# Altium PCB test.PcbDoc
Units mil, origin at the board's own origin, x right, y up, seen from the top; angles counter-clockwise.
Board outline 6000 x 4000 mil, 3 copper layers (Top Layer, Mid-Layer 4, Bottom Layer); 165 components, 138 nets, 748 pads, 4 vias.
Unrouted connection lines stored in the file: 565.
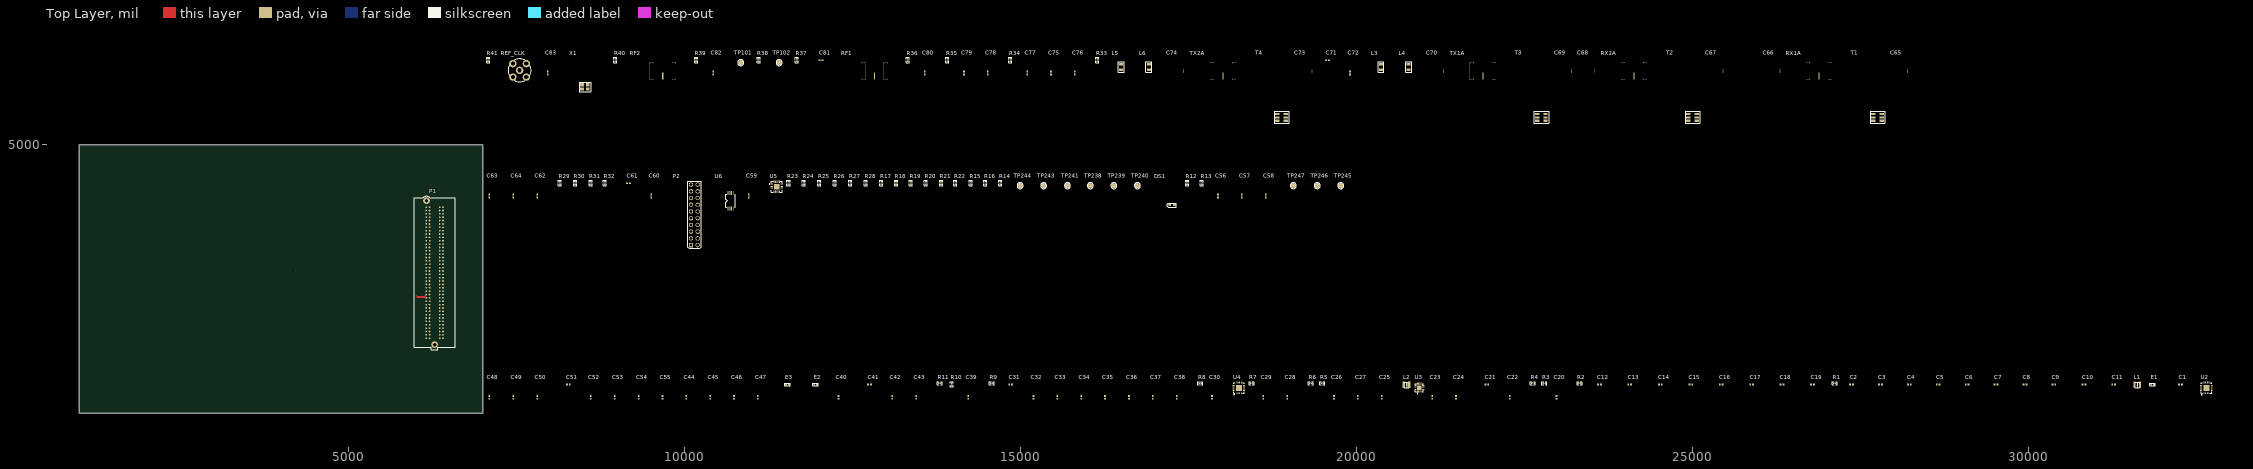
[diagram p0: Top Layer view]
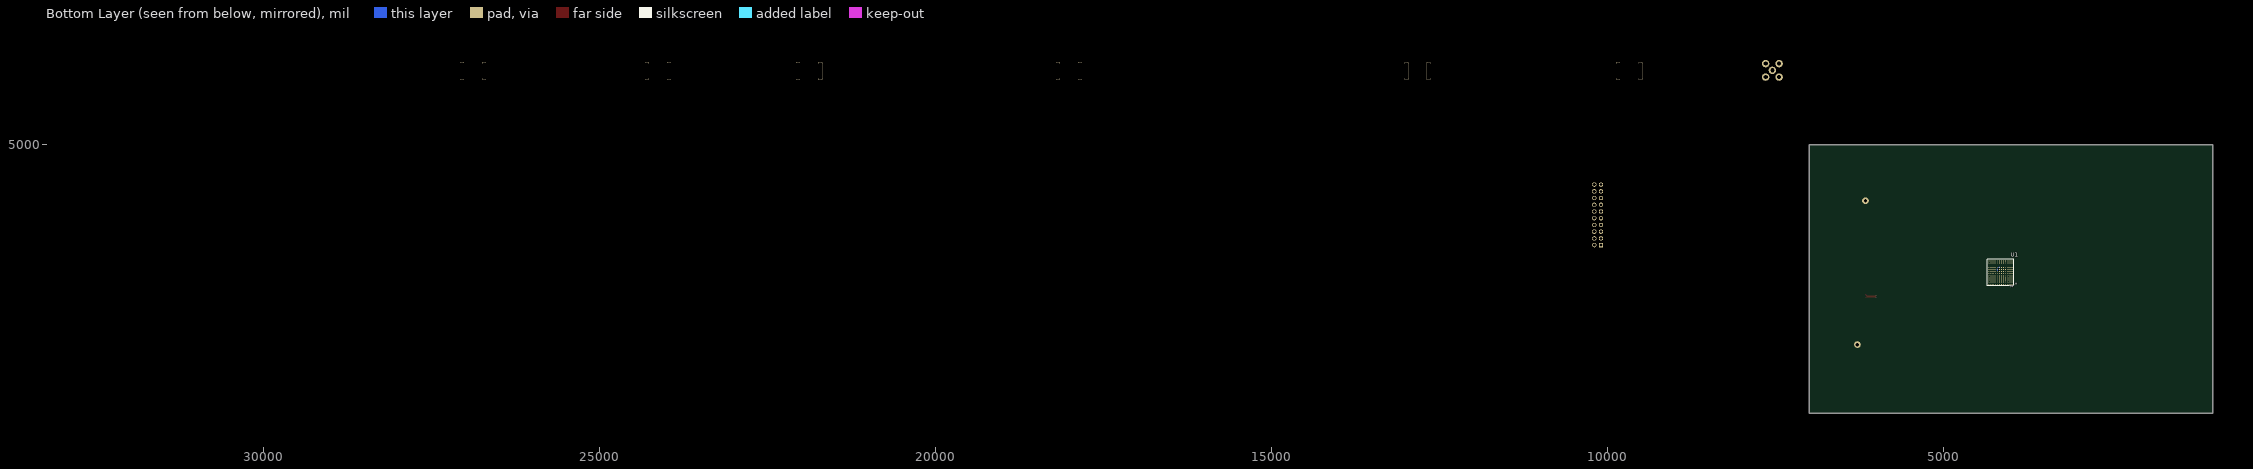
[diagram p1: Bottom Layer view, seen from below]
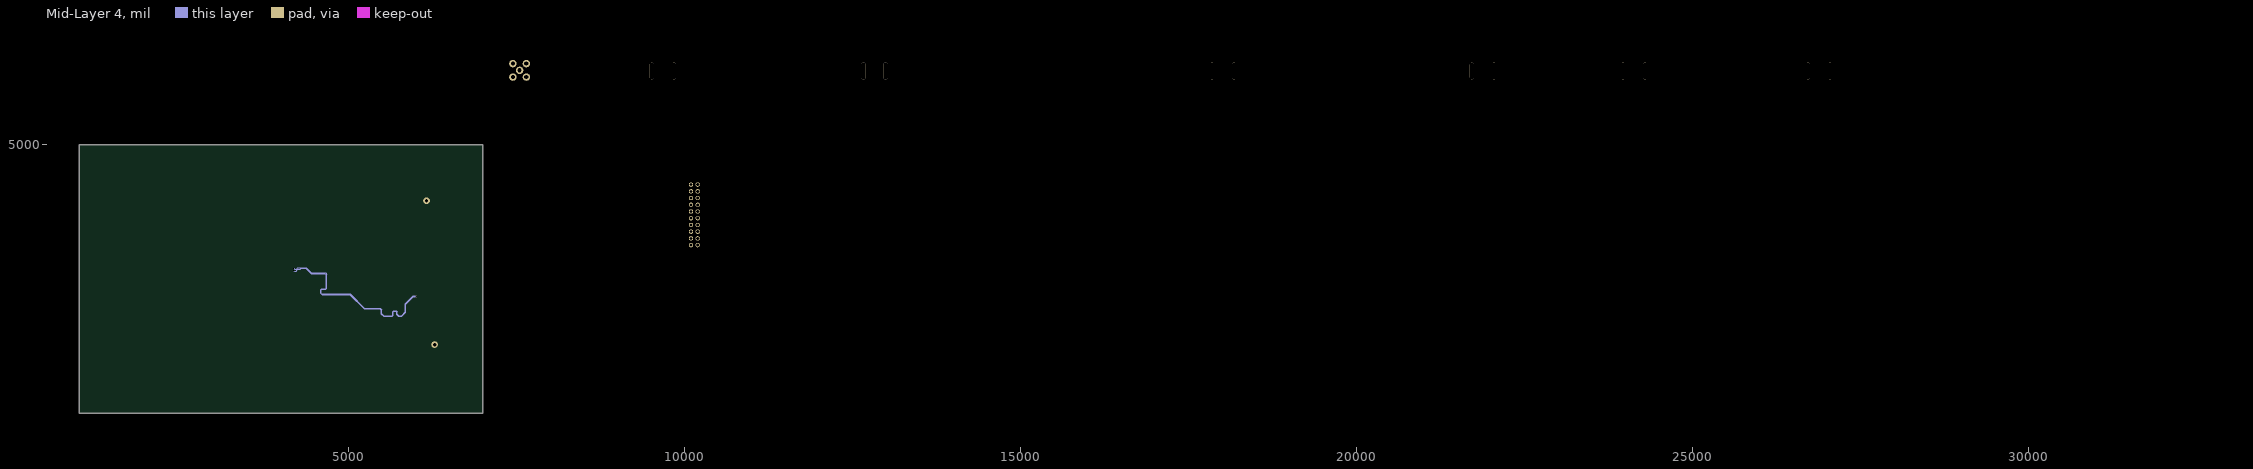
[diagram p2: Mid-Layer 4]

## Layer stack, top to bottom
Top Solder: solder mask 0.4, Solder Resist, Dk 3.5
Top Layer: signal copper 1.4
Dielectric 1: dielectric 12.6, FR-4, Dk 4.8
Mid-Layer 4: signal copper 1.4
Dielectric2: dielectric 12.6, FR-4, Dk 4.8
Bottom Layer: signal copper 1.4
Bottom Solder: solder mask 0.4, Solder Resist, Dk 3.5

## Board outline
1000,1000 7000,1000 7000,5000 1000,5000

## Design rules (kind name [scope] priority, off if disabled: settings)
Clearance [All] p1: gap=10 ignorepadtopadclearanceinfootprint=FALSE except(0: Arc-Hole Track-Hole SMDPad-Hole THPad-Hole Via-Hole Fill-Hole Poly-Hole Region-Hole Text-Hole)
DiffPairsRouting [All] p1: maxlimit=10 minlimit=10 mostfreqgap=10 toplayer_minwidth=15 toplayer_maxwidth=15 toplayer_prefwidth=15 midlayer4_minwidth=15 midlayer4_maxwidth=15 midlayer4_prefwidth=15 bottomlayer_minwidth=15 bottomlayer_maxwidth=15 bottomlayer_prefwidth=15 maxuncoupledlength=500
PolygonConnect [All] p1: connectstyle=Relief reliefconductorwidth=10 reliefentries=4 polygonreliefangle="90 Angle" airgapwidth=10
RoutingVias [All] p1: holewidth=28 width=50 viastyle="Through Hole" minholewidth=28 minwidth=50 maxholewidth=28 maxwidth=50
SolderMaskExpansion [All] p1: expansion=4 istentingtop=FALSE
Width [All] p1: maxlimit=10 minlimit=10 preferedwidth=10
29 further rules are at their usual default settings.

## Classes and differential pairs
component class "03 AD9361_Digital": C65 C66 C67 C68 C69 C70 C71 C72 C73 C74 C75 C76 C77 C78 C79 C80 C81 C82 C83 L3 L4 L5 L6 R33 R34 R35 R36 R37 R38 R39 R40 R41 REF_CLK RF1 RF2 RX1A RX2A T1 T2 T3 T4 TP101 TP102 TX1A TX2A U1 X1
component class "02 LP_FMC": C56 C57 C58 C59 C60 C61 C62 C63 C64 DS1 P1 P2 R12 R13 R14 R15 R16 R17 R18 R19 R20 R21 R22 R23 R24 R25 R26 R27 R28 R29 R30 R31 R32 TP238 TP239 TP240 TP241 TP243 TP244 TP245 TP246 TP247 U5 U6
component class "01 POWER": C1 C2 C3 C4 C5 C6 C7 C8 C9 C10 C11 C12 C13 C14 C15 C16 C17 C18 C19 C20 C21 C22 C23 C24 C25 C26 C27 C28 C29 C30 C31 C32 C33 C34 C35 C36 C37 C38 C39 C40 C41 C42 C43 C44 C45 C46 C47 C48 C49 C50 C51 C52 C53 C54 C55 E1 E2 E3 L1 L2 R1 R2 R3 R4 R5 R6 R7 R8 R9 R10 R11 U2 U3 U4
differential pair TX_FRAME: +TX_FRAME_P -TX_FRAME_N
differential pair TX_D5: +TX_D5_P -TX_D5_N
differential pair TX_D4: +TX_D4_P -TX_D4_N
differential pair TX_D3: +TX_D3_P -TX_D3_N
differential pair TX_D2: +TX_D2_P -TX_D2_N
differential pair TX_D1: +TX_D1_P -TX_D1_N
differential pair TX_D0: +TX_D0_P -TX_D0_N
differential pair TX2A: +TX2A_P -TX2A_N
differential pair TX1A: +TX1A_P -TX1A_N
differential pair RX_FRAME: +RX_FRAME_P -RX_FRAME_N
differential pair RX_D5: +RX_D5_P -RX_D5_N
differential pair RX_D4: +RX_D4_P -RX_D4_N
differential pair RX_D3: +RX_D3_P -RX_D3_N
differential pair RX_D2: +RX_D2_P -RX_D2_N
differential pair RX_D1: +RX_D1_P -RX_D1_N
differential pair RX_D0: +RX_D0_P -RX_D0_N
differential pair RX2A: +RX2A_P -RX2A_N
differential pair RX1A: +RX1A_P -RX1A_N
differential pair FB_CLK: +FB_CLK_P -FB_CLK_N
differential pair DATA_CLK: +DATA_CLK_P -DATA_CLK_N

## Components (designator, comment, footprint, x,y, rotation, side; value= is the part's Value field where it differs from the comment)
C1 "0.1UF" C0402 32260,1430 r0 top
C2 "10UF" C0402 27365,1430 r0 top
C3 "0.1UF" C0402 27795,1430 r0 top
C4 "10UF" C0402 28225,1430 r0 top
C5 "0.1UF" C0402 28655,1430 r0 top
C6 "0.1UF" C0402 29085,1430 r0 top
C7 "0.1UF" C0402 29515,1430 r0 top
C8 "1UF" C0402 29945,1430 r0 top
C9 "1UF" C0402 30375,1430 r0 top
C10 "0.01UF" C0402 30825,1430 r0 top
C11 "0.01UF" C0402 31265,1430 r0 top
C12 "10UF" C0402 23615,1430 r0 top
C13 "10UF" C0402 24065,1430 r0 top
C14 "0.1UF" C0402 24520,1430 r0 top
C15 "0.1UF" C0402 24975,1430 r0 top
C16 "0.1UF" C0402 25425,1430 r0 top
C17 "0.1UF" C0402 25880,1430 r0 top
C18 "0.01UF" C0402 26330,1430 r0 top
C19 "1UF" C0402 26785,1430 r0 top
C20 "0.01UF" C0402 22975,1240 r90 top
C21 "0.01UF" C0402 21940,1430 r0 top
C22 "1UF" C0402 22280,1240 r90 top
C23 "0.01UF" C0402 21125,1240 r90 top
C24 "1UF" C0402 21480,1240 r90 top
C25 "10μF" C0402 20375,1240 r90 top
C26 "0.01UF" C0402 19665,1240 r90 top
C27 "1UF" C0402 20020,1240 r90 top
C28 "10μF" C0402 18970,1240 r90 top
C29 "0.1μF" C0402 18615,1240 r90 top
C30 "0.1UF" C0402 17850,1240 r90 top
C31 "10UF" C0402 14855,1430 r0 top
C32 "10UF" C0402 15195,1240 r90 top
C33 "0.1UF" C0402 15550,1240 r90 top
C34 "0.1UF" C0402 15905,1240 r90 top
C35 "0.1UF" C0402 16260,1240 r90 top
C36 "0.1UF" C0402 16615,1240 r90 top
C37 "0.01UF" C0402 16970,1240 r90 top
C38 "1UF" C0402 17325,1240 r90 top
C39 "0.01UF" C0402 14225,1240 r90 top
C40 "0.01UF" C0402 12295,1240 r90 top
C41 "1UF" C0402 12755,1430 r0 top
C42 "0.01UF" C0402 13095,1240 r90 top
C43 "1UF" C0402 13450,1240 r90 top
C44 "0.01UF" C0402 10030,1240 r90 top
C45 "1UF" C0402 10385,1240 r90 top
C46 "0.01UF" C0402 10740,1240 r90 top
C47 "1UF" C0402 11095,1240 r90 top
C48 "10UF" C0402 7100,1240 r90 top
C49 "0.1UF" C0402 7455,1240 r90 top
C50 "10UF" C0402 7810,1240 r90 top
C51 "0.1UF" C0402 8275,1430 r0 top
C52 "1UF" C0402 8610,1240 r90 top
C53 "0.01UF" C0402 8965,1240 r90 top
C54 "1UF" C0402 9320,1240 r90 top
C55 "0.01UF" C0402 9675,1240 r90 top
C56 "0.1UF" C0402 17940,4235 r90 top
C57 "0.1UF" C0402 18295,4235 r90 top
C58 "0.1UF" C0402 18650,4235 r90 top
C59 "0.1UF" C0402 10960,4235 r90 top
C60 "0.1UF" C0402 9510,4235 r90 top
C61 "10UF" C0402 9170,4425 r0 top
C62 "1UF" C0402 7810,4235 r90 top
C63 "0.1UF" C0402 7100,4235 r90 top
C64 "10UF" C0402 7455,4235 r90 top
C65 "18PF" C0201 28200,6095 r90 top
C66 "18PF" C0201 26300,6095 r90 top
C67 "18PF" C0201 25450,6095 r90 top
C68 "18PF" C0201 23545,6095 r90 top
C69 "18PF" C0201 23200,6095 r90 top
C70 "18PF" C0201 21295,6095 r90 top
C71 "10UF" C0402 19570,6255 r0 top
C72 "1000PF" C0402 19905,6065 r90 top
C73 "18PF" C0201 19335,6095 r90 top
C74 "18PF" C0201 17430,6095 r90 top
C75 "10UF" C0402 15455,6065 r90 top
C76 "1000PF" C0402 15810,6065 r90 top
C77 "1UF" C0402 15100,6065 r90 top
C78 "1000PF" C0402 14515,6065 r90 top
C79 "1UF" C0402 14160,6065 r90 top
C80 "1000PF" C0402 13575,6065 r90 top
C81 "1000PF" C0402 12035,6255 r0 top
C82 "1000PF" C0402 10430,6065 r90 top
C83 "0.1UF" C0402 7970,6065 r90 top
DS1 "16-213SURC/S530-A3/TR8" LED0603 17255,4100 r0 top
E1 "750OHM" L0402 31845,1430 r0 top
E2 "750OHM" L0402 11955,1430 r0 top
E3 "750OHM" L0402 11535,1430 r0 top
L1 "0.47UH" L1008 31615,1425 r0 top
L2 "2.2UH" L1008 20745,1425 r0 top
L3 "330NH" L0805-F 20365,6155 r90 top
L4 "330NH" L0805-F 20775,6155 r90 top
L5 "330NH" L0805-F 16500,6155 r90 top
L6 "330NH" L0805-F 16910,6155 r90 top
P1 "ASP-134604-01" CNSAMTECASP-134604-01 6285,3088.5 r90 top
P2 "Header 10X2" CNBERGF2X10H335LD32 10150,3955 r90 top
R1 "0" LC-0402_R 27115,1450 r0 top
R2 "16K" LC-0402_R 23320,1450 r0 top
R3 "10K" LC-0402_R 22795,1450 r0 top
R4 "10K" LC-0402_R 22625,1450 r0 top
R5 "10K" LC-0402_R 19490,1450 r0 top
R6 "18.7K" LC-0402_R 19320,1450 r0 top
R7 "15K" LC-0402_R 18440,1450 r0 top
R8 "0" LC-0402_R 17675,1450 r0 top
R9 "16K" LC-0402_R 14575,1450 r0 top
R10 "10K" LC-0402_R 13980,1435 r90 top
R11 "10K" LC-0402_R 13800,1450 r0 top
R12 "10K" LC-0402_R 17480,4430 r90 top
R13 "237" LC-0402_R 17700,4430 r90 top
R14 "49.9" LC-0402_R 14700,4430 r90 top
R15 "2K" LC-0402_R 14260,4430 r90 top
R16 "2K" LC-0402_R 14480,4430 r90 top
R17 "10K" LC-0402_R 12930,4430 r90 top
R18 "10K" LC-0402_R 13150,4430 r90 top
R19 "10K" LC-0402_R 13370,4430 r90 top
R20 "10K" LC-0402_R 13590,4430 r90 top
R21 "10K" LC-0402_R 13820,4430 r90 top
R22 "10K" LC-0402_R 14030,4430 r90 top
R23 "16K" LC-0402_R 11550,4430 r90 top
R24 "16K" LC-0402_R 11780,4430 r90 top
R25 "16K" LC-0402_R 12010,4430 r90 top
R26 "16K" LC-0402_R 12240,4430 r90 top
R27 "16K" LC-0402_R 12470,4430 r90 top
R28 "16K" LC-0402_R 12700,4430 r90 top
R29 "10K" LC-0402_R 8145,4430 r90 top
R30 "10K" LC-0402_R 8375,4430 r90 top
R31 "10K" LC-0402_R 8605,4430 r90 top
R32 "10K" LC-0402_R 8815,4430 r90 top
R33 "14.3K" LC-0402_R 16145,6260 r90 top
R34 "1" LC-0402_R 14850,6260 r90 top
R35 "1" LC-0402_R 13910,6260 r90 top
R36 "10" LC-0402_R 13325,6260 r90 top
R37 "49.9" LC-0402_R 11675,6260 r90 top
R38 "10K" LC-0402_R 11105,6260 r90 top
R39 "10" LC-0402_R 10175,6260 r90 top
R40 "49.9" LC-0402_R 8975,6260 r90 top
R41 "49.9" LC-0402_R 7080,6260 r90 top
REF_CLK "DOSIN-806-0010" CNJOHNSON142-0701-201 7550,6105 r90 top
RF1 "DOSIN-806-0010" CNJOHNSON142-0701-851 12830,6105 r90 top
RF2 "DOSIN-806-0010" CNJOHNSON142-0701-851 9680,6105 r90 top
RX1A "DOSIN-806-0010" CNJOHNSON142-0701-851 26880,6105 r90 top
RX2A "DOSIN-806-0010" CNJOHNSON142-0701-851 24130,6105 r90 top
T1 "TCM1-63AX+" TSML150W160H160 27750,5405 r90 top
T2 "TCM1-63AX+" TSML150W160H160 25000,5405 r90 top
T3 "TCM1-63AX+" TSML150W160H160 22750,5405 r90 top
T4 "TCM1-63AX+" TSML150W160H160 18885,5405 r90 top
TP101 "TEST POINT SURFACE" TPC75D45 10840,6220 r90 top
TP102 "TEST POINT SURFACE" TPC75D45 11410,6220 r90 top
TP238 "TEST POINT SURFACE" TPC75D45 16040,4390 r90 top
TP239 "TEST POINT SURFACE" TPC75D45 16390,4390 r90 top
TP240 "TEST POINT SURFACE" TPC75D45 16740,4390 r90 top
TP241 "TEST POINT SURFACE" TPC75D45 15700,4390 r90 top
TP243 "TEST POINT SURFACE" TPC75D45 15345,4390 r90 top
TP244 "TEST POINT SURFACE" TPC75D45 14995,4390 r90 top
TP245 "TEST POINT SURFACE" TPC75D45 19765,4390 r90 top
TP246 "TEST POINT SURFACE" TPC75D45 19415,4390 r90 top
TP247 "TEST POINT SURFACE" TPC75D45 19060,4390 r90 top
TX1A "DOSIN-806-0010" CNJOHNSON142-0701-851 21880,6105 r90 top
TX2A "DOSIN-806-0010" CNJOHNSON142-0701-851 18015,6105 r90 top
U1 "AD9363" AD936X 4121.03,3086.54 r0 bottom
U2 "ADP1755ACPZ-R7" LFCSP-WQ-16_L4.0-W4.0-P0.65-EP2.3-BL-EP 32645,1380 r0 top
U3 "TLV62130" TLV62130RGT 20935,1385 r0 top
U4 "ADP1755ACPZ-R7" LFCSP-WQ-16_L4.0-W4.0-P0.65-EP2.3-BL-EP 18250,1380 r0 top
U5 "AD7291BCPZ-RL7" LFCSP-20_L4.0-W4.0-P0.50-TL-EP2.7 11375,4375 r0 top
U6 "M24C02-WDW6TP" TSSOP8 10690,4165 r0 top
X1 "40MHz" XTALNX3225 8520,5860 r0 top

## Footprints (in the part's own frame and the unit in brackets; to place one, negate y for a bottom-side part, rotate by r counter-clockwise, add the part's x,y. Pads: shape width x height; smd on the part's side, far side on the other; paste and mask are expansions set on the pad)
AD936X [mil]
  round 14 smd: A1(-137.01,164.51) A2(-105.51,164.51) A3(-74.02,164.51) A4(-42.52,164.51) A5(-11.02,164.51) A6(20.47,164.51) A7(51.97,164.51) A8(83.46,164.51) A9(114.96,164.51) A10(146.46,164.51) A11(177.95,164.51) A12(209.45,164.51) B1(-137.01,133.01) B2(-105.51,133.01) B3(-74.02,133.01) B4(-42.52,133.01) B5(-11.02,133.01) B6(20.47,133.01) B7(51.97,133.01) B8(83.46,133.01) B9(114.96,133.01) B10(146.46,133.01) B11(177.95,133.01) B12(209.45,133.01) C1(-137.01,101.52) C2(-105.51,101.52) C3(-74.02,101.52) C4(-42.52,101.52) C5(-11.02,101.52) C6(20.47,101.52) C7(51.97,101.52) C8(83.46,101.52) C9(114.96,101.52) C10(146.46,101.52) C11(177.95,101.52) C12(209.45,101.52) D1(-137.01,70.02) D2(-105.51,70.02) D3(-74.02,70.02) D4(-42.52,70.02) D5(-11.02,70.02) D6(20.47,70.02) D7(51.97,70.02) D8(83.46,70.02) D9(114.96,70.02) D10(146.46,70.02) D11(177.95,70.02) D12(209.45,70.02) E1(-137.01,38.52) E2(-105.51,38.52) E3(-74.02,38.52) E4(-42.52,38.52) E5(-11.02,38.52) E6(20.47,38.52) E7(51.97,38.52) E8(83.46,38.52) E9(114.96,38.52) E10(146.46,38.52) E11(177.95,38.52) E12(209.45,38.52) F1(-137.01,7.03) F2(-105.51,7.03) F3(-74.02,7.03) F4(-42.52,7.03) F5(-11.02,7.03) F6(20.47,7.03) F7(51.97,7.03) F8(83.46,7.03) F9(114.96,7.03) F10(146.46,7.03) F11(177.95,7.03) F12(209.45,7.03) G1(-137.01,-24.47) G2(-105.51,-24.47) G3(-74.02,-24.47) G4(-42.52,-24.47) G5(-11.02,-24.47) G6(20.47,-24.47) G7(51.97,-24.47) G8(83.46,-24.47) G9(114.96,-24.47) G10(146.46,-24.47) G11(177.95,-24.47) G12(209.45,-24.47) H1(-137.01,-55.96) H2(-105.51,-55.96) H3(-74.02,-55.96) H4(-42.52,-55.96) H5(-11.02,-55.96) H6(20.47,-55.96) H7(51.97,-55.96) H8(83.46,-55.96) H9(114.96,-55.96) H10(146.46,-55.96) H11(177.95,-55.96) H12(209.45,-55.96) J1(-137.01,-87.46) J2(-105.51,-87.46) J3(-74.02,-87.46) J4(-42.52,-87.46) J5(-11.02,-87.46) J6(20.47,-87.46) J7(51.97,-87.46) J8(83.46,-87.46) J9(114.96,-87.46) J10(146.46,-87.46) J11(177.95,-87.46) J12(209.45,-87.46) K1(-137.01,-118.96) K2(-105.51,-118.96) K3(-74.02,-118.96) K4(-42.52,-118.96) K5(-11.02,-118.96) K6(20.47,-118.96) K7(51.97,-118.96) K8(83.46,-118.96) K9(114.96,-118.96) K10(146.46,-118.96) K11(177.95,-118.96) K12(209.45,-118.96) L1(-137.01,-150.45) L2(-105.51,-150.45) L3(-74.02,-150.45) L4(-42.52,-150.45) L5(-11.02,-150.45) L6(20.47,-150.45) L7(51.97,-150.45) L8(83.46,-150.45) L9(114.96,-150.45) L10(146.46,-150.45) L11(177.95,-150.45) L12(209.45,-150.45) M1(-137.01,-181.95) M2(-105.51,-181.95) M3(-74.02,-181.95) M4(-42.52,-181.95) M5(-11.02,-181.95) M6(20.47,-181.95) M7(51.97,-181.95) M8(83.46,-181.95) M9(114.96,-181.95) M10(146.46,-181.95) M11(177.95,-181.95) M12(209.45,-181.95)
  silkscreen extent -161,-206 233,188
C0201 [mil] "C0201"
  rect 14x14 smd: 1(-12,0) 2(12,0)
C0402 [mil] "C0402"
  rect 27.5x25 smd: 1(-21.25,0) 2(21.25,0)
CNBERGF2X10H335LD32 [mil] "CNBERGF2X10H335LD32"
  rect 65x65 / inner round 65 / far side rect 65x65 hole 45: 1(-450,50)
  round 65 hole 45: 2(-450,-50) 3(-350,50) 4(-350,-50) 5(-250,50) 6(-250,-50) 7(-150,50) 8(-150,-50) 9(-50,50) 10(-50,-50) 11(50,50) 12(50,-50) 13(150,50) 14(150,-50) 15(250,50) 16(250,-50) 17(350,50) 18(350,-50) 19(450,50) 20(450,-50)
  silkscreen extent -500,-100 500,100
CNJOHNSON142-0701-201 [mil] "CNJOHNSON142-0701-201"
  round 110 hole 63: 1(100,100) 2(100,-100) 3(-100,-100) 4(-100,100) 5(0,0)
  silkscreen extent -169,-172 169,172
CNJOHNSON142-0701-851 [mil] "CNJOHNSON142-0701-851"
  rect 100x17 smd: 1(-85,0)
  rect 250x60 / inner oval 250x60 / far side rect 250x60 hole 60 slot 250 at 0 deg: 2(-10,-165) 4(-10,165)
  round 12 smd: 3(-10,-165) 5(-10,165)
CNSAMTECASP-134604-01 [mil] "CNSAMTECASP-134604-01"
  round 25 smd: C1(-968.5,-125) C2(-918.5,-125) C3(-868.5,-125) C4(-818.5,-125) C5(-768.5,-125) C6(-718.5,-125) C7(-668.5,-125) C8(-618.5,-125) C9(-568.5,-125) C10(-518.5,-125) C11(-468.5,-125) C12(-418.5,-125) C13(-368.5,-125) C14(-318.5,-125) C15(-268.5,-125) C16(-218.5,-125) C17(-168.5,-125) C18(-118.5,-125) C19(-68.5,-125) C20(-18.5,-125) C21(31.5,-125) C22(81.5,-125) C23(131.5,-125) C24(181.5,-125) C25(231.5,-125) C26(281.5,-125) C27(331.5,-125) C28(381.5,-125) C29(431.5,-125) C30(481.5,-125) C31(531.5,-125) C32(581.5,-125) C33(631.5,-125) C34(681.5,-125) C35(731.5,-125) C36(781.5,-125) C37(831.5,-125) C38(881.5,-125) C39(931.5,-125) C40(981.5,-125) D1(-968.5,-75) D2(-918.5,-75) D3(-868.5,-75) D4(-818.5,-75) D5(-768.5,-75) D6(-718.5,-75) D7(-668.5,-75) D8(-618.5,-75) D9(-568.5,-75) D10(-518.5,-75) D11(-468.5,-75) D12(-418.5,-75) D13(-368.5,-75) D14(-318.5,-75) D15(-268.5,-75) D16(-218.5,-75) D17(-168.5,-75) D18(-118.5,-75) D19(-68.5,-75) D20(-18.5,-75) D21(31.5,-75) D22(81.5,-75) D23(131.5,-75) D24(181.5,-75) D25(231.5,-75) D26(281.5,-75) D27(331.5,-75) D28(381.5,-75) D29(431.5,-75) D30(481.5,-75) D31(531.5,-75) D32(581.5,-75) D33(631.5,-75) D34(681.5,-75) D35(731.5,-75) D36(781.5,-75) D37(831.5,-75) D38(881.5,-75) D39(931.5,-75) D40(981.5,-75) G1(-968.5,75) G2(-918.5,75) G3(-868.5,75) G4(-818.5,75) G5(-768.5,75) G6(-718.5,75) G7(-668.5,75) G8(-618.5,75) G9(-568.5,75) G10(-518.5,75) G11(-468.5,75) G12(-418.5,75) G13(-368.5,75) G14(-318.5,75) G15(-268.5,75) G16(-218.5,75) G17(-168.5,75) G18(-118.5,75) G19(-68.5,75) G20(-18.5,75) G21(31.5,75) G22(81.5,75) G23(131.5,75) G24(181.5,75) G25(231.5,75) G26(281.5,75) G27(331.5,75) G28(381.5,75) G29(431.5,75) G30(481.5,75) G31(531.5,75) G32(581.5,75) G33(631.5,75) G34(681.5,75) G35(731.5,75) G36(781.5,75) G37(831.5,75) G38(881.5,75) G39(931.5,75) G40(981.5,75) H1(-968.5,125) H2(-918.5,125) H3(-868.5,125) H4(-818.5,125) H5(-768.5,125) H6(-718.5,125) H7(-668.5,125) H8(-618.5,125) H9(-568.5,125) H10(-518.5,125) H11(-468.5,125) H12(-418.5,125) H13(-368.5,125) H14(-318.5,125) H15(-268.5,125) H16(-218.5,125) H17(-168.5,125) H18(-118.5,125) H19(-68.5,125) H20(-18.5,125) H21(31.5,125) H22(81.5,125) H23(131.5,125) H24(181.5,125) H25(231.5,125) H26(281.5,125) H27(331.5,125) H28(381.5,125) H29(431.5,125) H30(481.5,125) H31(531.5,125) H32(581.5,125) H33(631.5,125) H34(681.5,125) H35(731.5,125) H36(781.5,125) H37(831.5,125) H38(881.5,125) H39(931.5,125) H40(981.5,125)
  round 100 hole 50 unplated: ""(-1063.5,0) ""(1076.5,120)
  silkscreen extent -1142,-304 1141,304
L0402 [mil] "L0402"
  rect 27.5x25 smd: 1(-21.25,0) 2(21.25,0)
  silkscreen extent -41,-19 41,19
L0805-F [mil] "L0805-F"
  rect 43x59 smd: 1(41.19,0) 2(-41.19,0)
  silkscreen extent -78,-45 78,45
L1008 [mil]
  rect 33.5x98.4 smd: 1(-39.92,0) 2(40.08,0)
  silkscreen extent -31,-39 31,39
LC-0402_R [mm]
  rect 0.6x0.65 smd mask+0.051: 1(-0.425,0) 2(0.425,0)
  silkscreen extent -0.97,-0.58 0.97,0.58, body extent -0.57,-0.27 0.58,0.28, height 0.41
LED0603 [mil] "LED0603"
  rect 38x30 smd: A(31.5,0) C(-31.5,0)
  silkscreen extent -72,-31 66,31
LFCSP-20_L4.0-W4.0-P0.50-TL-EP2.7 [mm]
  rect 0.985x0.28 smd: 1(-1.868,1) 2(-1.868,0.5) 3(-1.868,0) 4(-1.868,-0.5) 5(-1.868,-1) 11(1.868,-1) 12(1.868,-0.5) 13(1.868,0) 14(1.868,0.5) 15(1.868,1)
  rect 0.28x0.985 smd: 6(-1,-1.868) 7(-0.5,-1.868) 8(0,-1.868) 9(0.5,-1.868) 10(1,-1.868) 16(1,1.868) 17(0.5,1.868) 18(0,1.868) 19(-0.5,1.868) 20(-1,1.868)
  rect 2.15x2.15 smd: 21(0,0)
  silkscreen extent -2.73,-2.08 2.08,2.08
LFCSP-WQ-16_L4.0-W4.0-P0.65-EP2.3-BL-EP [mm]
  rect 0.35x0.7 smd: 1(-0.975,-2) 2(-0.325,-2) 3(0.325,-2) 4(0.975,-2) 9(0.975,2) 10(0.325,2) 11(-0.325,2) 12(-0.975,2)
  rect 0.7x0.35 smd: 5(2,-0.975) 6(2,-0.325) 7(2,0.325) 8(2,0.975) 13(-2,0.975) 14(-2,0.325) 15(-2,-0.325) 16(-2,-0.975)
  rect 2.25x2.25 smd: 17(0,0)
  silkscreen extent -2,-2.56 2,2
TLV62130RGT [mil]
  oval 11x33.5 smd: 1(-29.5,-58.6) 2(-9.8,-58.6) 3(9.8,-58.6) 4(29.5,-58.6) 9(29.5,57.6) 10(9.8,57.6) 11(-9.8,57.6) 12(-29.5,57.6)
  oval 33.5x11 smd: 5(58.1,-30) 6(58.1,-10.3) 7(58.1,9.3) 8(58.1,29) 13(-58.1,29) 14(-58.1,9.3) 15(-58.1,-10.3) 16(-58.1,-30)
  rect 66.9x66.9 smd: 20(0,-0.5)
  silkscreen extent -59,-94 59,59
TPC75D45 [mil] "TPC75D45"
  round 75 smd: 1(0,0)
  silkscreen extent -45,-45 45,45
TSML150W160H160 [mil] "TSML150W160H160"
  rect 30x65.01 smd: 1(-50,62.5) 2(0,62.5) 3(50,62.5) 4(50,-62.5) 5(0,-62.5) 6(-50,-62.5)
  silkscreen extent -90,-110 90,110
TSSOP8 [mil] "TSSOP8"
  rect 13x65 smd: 1(-38.39,-114.96) 2(-12.8,-114.96) 3(12.8,-114.96) 4(38.39,-114.96) 5(38.39,114.96) 6(12.8,114.96) 7(-12.8,114.96) 8(-38.39,114.96)
  silkscreen extent -71,-99 71,99
XTALNX3225 [mil] "XTALNX3225"
  rect 55.01x47 smd: 1(-43.32,-31.51) 2(43.3,-31.51) 3(43.3,31.5) 4(-43.32,31.5)
  silkscreen extent -86,-70 86,70

## Part data
C1 C2 C3 C4 C5 C6 C7 C12 C13 C14 C15 C16 C17 C20 C30 C31 C32 C33 C34 C35 C36 C39 C48 C49 C50 C51 C56 C57 C58 C59 C60 C61 C63 C64 C65 C66 C67 C68 C69 C70 C71 C73 C74 C75 C83: BOM_Manufacturer=WTC, BOM_Manufacturer Part=0402B104K160, BOM_Supplier=LCSC, BOM_Supplier Part=C83056, nameAlias=Capacitance, spicePre=C, spiceSymbolName=0402B104K160
C8 C9 C10 C11 C18 C19 C21 C22 C23 C24 C26 C27 C37 C38 C40 C41 C42 C43 C44 C45 C46 C47 C52 C53 C54 C55: library part 10UF, BOM_Manufacturer=WTC, BOM_Manufacturer Part=0402B104K160, BOM_Supplier=LCSC, BOM_Supplier Part=C83056, nameAlias=Capacitance, spicePre=C, spiceSymbolName=0402B104K160
C25 C28 C29: library part CAP_3, "Capacitor"
C62 C77 C79: library part 0.1UF, BOM_Manufacturer=WTC, BOM_Manufacturer Part=0402B104K160, BOM_Supplier=LCSC, BOM_Supplier Part=C83056, nameAlias=Capacitance, spicePre=C, spiceSymbolName=0402B104K160
C72 C76 C80 C82: library part 18PF, BOM_Manufacturer=WTC, BOM_Manufacturer Part=0402B104K160, BOM_Supplier=LCSC, BOM_Supplier Part=C83056, nameAlias=Capacitance, spicePre=C, spiceSymbolName=0402B104K160
C78 C81: library part 100PF, BOM_Manufacturer=WTC, BOM_Manufacturer Part=0402B104K160, BOM_Supplier=LCSC, BOM_Supplier Part=C83056, nameAlias=Capacitance, spicePre=C, spiceSymbolName=0402B104K160
DS1: BOM_Manufacturer="Everlight Elec", BOM_Manufacturer Part=16-213SURC/S530-A3/TR8, BOM_Supplier=LCSC, BOM_Supplier Part=C605452, Contributor=LCSC, spicePre=L, spiceSymbolName=16-213SURC/S530-A3/TR8
E1 E2 E3: library part 100OHM, BOM_Manufacturer=Murata, BOM_Manufacturer Part=BLM21PG221SN1x, BOM_Supplier=LCSC, Contributor=prophetC, spicePre=L, spiceSymbolName="220ohm at 100MHz"
L1 L2: library part INDUCTANCE_1, "Inductance"
L3 L4 L5 L6: BOM_JLCPCB SMD=Yes, BOM_Manufacturer=Sunlord, BOM_Manufacturer Part=GZ1608D121TF, BOM_Supplier=LCSC, BOM_Supplier Part=C12391, nameAlias=Value, SMT Type=Extend, spicePre=L, spiceSymbolName=GZ1608D121TF-C12391
P2: "Header, 10-Pin, Dual row", LatestRevisionDate=17-Jul-2002, LatestRevisionNote="Re-released for DXP Platform.", Publisher="Altium Limited"
R1 R8 R36 R37 R39 R40 R41: library part 1, BOM_Manufacturer=YAGEO, BOM_Manufacturer Part=RC0402FR-0780R6L, BOM_Supplier=LCSC, BOM_Supplier Part=C185392, Contributor=LCSC, nameAlias="Resistance (Ohms)", spicePre=R, spiceSymbolName=RC0402FR-0780R6L
R2 R9 R23 R24 R25 R26 R27 R28 R33: library part 10K, BOM_Manufacturer=YAGEO, BOM_Manufacturer Part=RC0402FR-0780R6L, BOM_Supplier=LCSC, BOM_Supplier Part=C185392, Contributor=LCSC, nameAlias="Resistance (Ohms)", spicePre=R, spiceSymbolName=RC0402FR-0780R6L
R3 R4 R10 R11 R12 R17 R18 R19 R20 R21 R22 R29 R30 R31 R32 R34 R35 R38: BOM_Manufacturer=YAGEO, BOM_Manufacturer Part=RC0402FR-0780R6L, BOM_Supplier=LCSC, BOM_Supplier Part=C185392, Contributor=LCSC, nameAlias="Resistance (Ohms)", spicePre=R, spiceSymbolName=RC0402FR-0780R6L
R5 R6 R7: library part RES, "Resistor"
R13: library part 10R, BOM_Manufacturer=YAGEO, BOM_Manufacturer Part=RC0402FR-0780R6L, BOM_Supplier=LCSC, BOM_Supplier Part=C185392, Contributor=LCSC, nameAlias="Resistance (Ohms)", spicePre=R, spiceSymbolName=RC0402FR-0780R6L
R14: library part 39, BOM_Manufacturer=YAGEO, BOM_Manufacturer Part=RC0402FR-0780R6L, BOM_Supplier=LCSC, BOM_Supplier Part=C185392, Contributor=LCSC, nameAlias="Resistance (Ohms)", spicePre=R, spiceSymbolName=RC0402FR-0780R6L
R15 R16: library part 1K, BOM_Manufacturer=YAGEO, BOM_Manufacturer Part=RC0402FR-0780R6L, BOM_Supplier=LCSC, BOM_Supplier Part=C185392, Contributor=LCSC, nameAlias="Resistance (Ohms)", spicePre=R, spiceSymbolName=RC0402FR-0780R6L
REF_CLK RF1 RF2 RX1A RX2A TX1A TX2A: BOM_Manufacturer=dosinconn, BOM_Manufacturer Part=DOSIN-806-0010, BOM_Supplier=LCSC, BOM_Supplier Part=C521221, Contributor=LCSC, spicePre=R, spiceSymbolName=DOSIN-806-0010
TP101 TP102 TP238 TP239 TP240 TP241 TP243 TP244 TP245 TP246 TP247: library part "TEST POINT SURFACE_1"
U2 U4 U5: BOM_Manufacturer="Analog Devices", BOM_Paste Type=expand, BOM_Supplier=LCSC, Contributor=LCSC, spicePre=U
  U2 U4: BOM_Manufacturer Part=ADP1755ACPZ-R7, BOM_Supplier Part=C403695, spiceSymbolName=ADP1755ACPZ-R7
  U5: BOM_Manufacturer Part=AD7291BCPZ-RL7, BOM_Supplier Part=C207434, spiceSymbolName=AD7291BCPZ-RL7
U6: BOM_Manufacturer=STMicroelectronics, BOM_Manufacturer Part=M24C02-WDW6TP, BOM_Paste Type=expand, BOM_Supplier=LCSC, BOM_Supplier Part=C283436, Contributor=LCSC, spicePre=U, spiceSymbolName=M24C02-WDW6TP
X1: library part 30MHz, BOM_Manufacturer=NDK, BOM_Manufacturer Part=NX3225SA-30M, BOM_Supplier=LCSC, BOM_Supplier Part=C139739, Contributor=LCSC, nameAlias=Frequency, spicePre=X, spiceSymbolName=NX3225SA-30M
T1 T2 T3 T4: Contributor=GaAs, spicePre=T, spiceSymbolName=TCM1-63AX+
U1: Contributor=fumanduo, spicePre=U, spiceSymbolName=AD9363_PLUTO

## Via types
v1: diameter 16, hole 8, Top Layer to Bottom Layer, 2 vias
v2: diameter 12, hole 6, Top Layer to Bottom Layer, 2 vias

## Nets (pads, with @x,y where several pads share a name; then routed paths per layer and width w, separated by ;. In a path a pad name is that pad's centre, name@x,y a point inside that pad or via, vN(x,y) a via of type N, cw(c..) or ccw(c..) an arc to the next point about the centre after c; other vN are vias at no path point)
1P3_SUPPLY_A: C18.1 C19.1 C21.1 C22.1 C23.1 C24.1 C26.1 C27.1 R1.2 R19.1 TP241.1 U1.B9 U1.B10 U1.E2 U1.F2 U1.J3 U1.K3
1P3_SUPPLY_B: C37.1 C38.1 C40.1 C41.1 C42.1 C43.1 C44.1 C45.1 C46.1 C47.1 C71.2 C72.2 C75.2 C76.2 L3.1 L4.1 L5.1 L6.1 R8.2 R17.1 TP244.1 U1.A9 U1.A10 U1.D2 U1.D3 U1.E3 U1.F12 U1.K4 U1.M9 U1.M10
1P8V: C1.2 C25.2 C30.2 E2.2 L2.2 R5.1 R6.1 R13.2 U2.1 U2.2 U2.3 U2.15 U2.16 U3.14 U4.1 U4.2 U4.3 U4.15 U4.16
3.3VAUX: C59.2 C63.1 C64.1 P1.D32 R15.2 R16.2 R20.1 TP238.1 U5.10 U5.16 U5.17 U6.8
3P3V: C2.1 C3.1 L1.1 P1.C39 P1.D36 P1.D38 P1.D40 R21.1 TP239.1
12V: P1.C35 P1.C37
AUXADC: C58.1 TP245.1 U1.L5
AUXDAC1: C56.1 TP247.1 U1.B3
AUXDAC2: C57.1 TP246.1 U1.C3
CLK_OUT: C60.2 P1.H4 U1.J6
CTRL_IN0: P1.H28 P2.20 R31.2 U1.C5
CTRL_IN1: P1.H29 P2.19 R30.2 U1.C6
CTRL_IN2: P1.G27 P2.18 R32.2 U1.D6
CTRL_IN3: P1.G28 P2.17 R29.2 U1.D5
CTRL_OUT0: P1.G21 P2.11 U1.D4
CTRL_OUT1: P1.G22 P2.10 U1.E4
CTRL_OUT2: P1.H25 P2.9 U1.E5
CTRL_OUT3: P1.H26 P2.8 U1.E6
CTRL_OUT4: P1.G24 P2.7 U1.F6
CTRL_OUT5: P1.G25 P2.6 U1.F5
CTRL_OUT6: P1.D23 P2.5 U1.F4
CTRL_OUT7: P1.D24 P2.4 U1.G4
DATA_CLK_N: P1.G7 U1.H11
DATA_CLK_P: P1.G6 U1.G11
EN_AGC: P1.H22 P2.3 U1.G5
ENABLE: P1.G18 P2.1 U1.G6
FB_CLK_N: P1.G13 U1.G10
FB_CLK_P: P1.G12 U1.F10
GA0: P1.C34 U5.11 U6.2
GA1: P1.D35 U5.13 U6.1
GND: C1.1 C2.2 C3.2 C4.2 C5.2 C6.2 C7.2 C8.2 C9.2 C10.2 C11.2 C12.2 C13.2 C14.2 C15.2 C16.2 C17.2 C18.2 C19.2 C20.2 C21.2 C22.2 C23.2 C24.2 C25.1 C26.2 C27.2 C28.1 C29.1 C30.1 C31.2 C32.2 C33.2 C34.2 C35.2 C36.2 C37.2 C38.2 C39.2 C40.2 C41.2 C42.2 C43.2 C44.2 C45.2 C46.2 C47.2 C48.2 C49.2 C50.2 C51.2 C52.2 C53.2 C54.2 C55.2 C56.2 C57.2 C58.2 C59.1 C61.1 C62.2 C63.2 C64.2 C71.1 C72.1 C75.1 C76.1 C77.1 C78.2 C79.1 C81.2 P1.C1 P1.C4 P1.C5 P1.C8 P1.C9 P1.C12 P1.C13 P1.C16 P1.C17 P1.C20 P1.C21 P1.C24 P1.C25 P1.C28 P1.C29 P1.C32 P1.C33 P1.C36 P1.C38 P1.C40 P1.D2 P1.D3 P1.D6 P1.D7 P1.D10 P1.D13 P1.D16 P1.D19 P1.D22 P1.D25 P1.D28 P1.D37 P1.D39 P1.G1 P1.G4 P1.G5 P1.G8 P1.G11 P1.G14 P1.G17 P1.G20 P1.G23 P1.G26 P1.G29 P1.G32 P1.G35 P1.G38 P1.G40 P1.H2 P1.H3 P1.H6 P1.H9 P1.H12 P1.H15 P1.H18 P1.H21 P1.H24 P1.H27 P1.H30 P1.H33 P1.H36 P1.H39 R4.1 R7.2 R11.1 R23.2 R24.2 R25.2 R26.2 R27.2 R28.2 R29.1 R30.1 R31.1 R32.1 R33.1 R37.1 R38.1 R40.1 R41.1 REF_CLK.1 REF_CLK.2 REF_CLK.3 REF_CLK.4 RF1.1 RF1.2 RF1.3 RF1.4 RF2.1 RF2.2 RF2.3 RF2.4 RX1A.1 RX1A.2 RX1A.3 RX1A.4 RX2A.1 RX2A.2 RX2A.3 RX2A.4 T1.1 T1.2 T1.5 T2.1 T2.2 T2.5 T3.1 T3.2 T3.5 T4.1 T4.2 T4.5 TX1A.1 TX1A.2 TX1A.3 TX1A.4 TX2A.1 TX2A.2 TX2A.3 TX2A.4 U1.A4 U1.A6 U1.B1 U1.B2 U1.B12 U1.C1 U1.C2 U1.C4 U1.C7 U1.C8 U1.C9 U1.C10 U1.C11 U1.C12 U1.D1 U1.D12 U1.E1 U1.F1 U1.F3 U1.F7 U1.F9 U1.F11 U1.G12 U1.H1 U1.H2 U1.H3 U1.H6 U1.H7 U1.H10 U1.J1 U1.J2 U1.K1 U1.K2 U1.K12 U1.L1 U1.L2 U1.L3 U1.L7 U1.L8 U1.L9 U1.L10 U1.L11 U1.L12 U1.M4 U1.M6 U2.6 U2.17 U3.6 U3.7 U3.8 U3.15 U3.16 U3.20 U4.6 U4.17 U5.4 U5.5 U5.6 U5.9 U5.21 U6.3 U6.4 U6.7 X1.2 X1.4
GPO0: P2.12 U1.B7
GPO1: P2.13 U1.B6
GPO2: P2.14 U1.B5
GPO3: P2.15 U1.B4
NetC4_1: C4.1 C5.1 C6.1 C28.2 E1.2 L1.2 U3.10 U3.11 U3.12
NetC12_1: C12.1 C13.1 C14.1 C15.1 C16.1 C17.1 R1.1 R2.2 U2.10 U2.11 U2.12 U2.13 U2.14
NetC20_1: C20.1 U2.7
NetC29_2: C29.2 U3.9
NetC31_1: C31.1 C32.1 C33.1 C34.1 C35.1 C36.1 R8.1 R9.2 U4.10 U4.11 U4.12 U4.13 U4.14
NetC39_1: C39.1 U4.7
NetC60_1: C60.1 P2.16
NetC61_2: C61.2 U5.7
NetC62_1: C62.1 U5.8
NetC65_2: C65.2 T1.6
NetC66_2: C66.2 T1.4
NetC67_2: C67.2 T2.6
NetC68_2: C68.2 T2.4
NetC69_2: C69.2 T3.6
NetC70_2: C70.2 T3.4
NetC73_2: C73.2 T4.6
NetC74_2: C74.2 T4.4
NetC77_2: C77.2 R34.2
NetC79_2: C79.2 R35.2
NetC80_1: C80.1 R36.2
NetC82_1: C82.1 R39.2
NetC83_1: C83.1 U1.M12 X1.1
NetC83_2: C83.2 R41.2 REF_CLK.5
NetDS1_2: R13.1
NetL2_1: L2.1 U3.1 U3.2 U3.3
NetP1_D27: P1.D27 R14.1
NetP1_D30: P1.D30 P1.D31
NetR2_1: R2.1 R4.2 U2.9
NetR6_2: R6.2 R7.1 U3.5
NetR9_1: R9.1 R11.2 U4.9
NetR17_2: R17.2 R23.1 U5.3
NetR18_2: R18.2 R24.1 U5.2
NetR19_2: R19.2 R25.1 U5.1
NetR20_2: R20.2 R26.1 U5.20
NetR21_2: R21.2 R27.1 U5.19
NetR22_2: R22.2 R28.1 U5.18
NetR33_2: R33.2 U1.L4
NetR36_1: R36.1 R37.2 RF1.5
NetR39_1: R39.1 R40.2 RF2.5
NetRX1A_5: RX1A.5 T1.3
NetRX2A_5: RX2A.5 T2.3
NetT3_3: T3.3 TX1A.5
NetT4_3: T4.3 TX2A.5
NetU1_M11: U1.M11 X1.3
PG_1P3_A: R3.2 U2.5
PG_1P3_B: R10.2 U4.5
PG_1P8V: U2.4 U4.4
PG_1V8: R5.2 U3.4
PG_FMC: P1.D1 U3.13
RESETB: P1.H31 U1.K5
RX1A_N: C65.1 U1.M2
RX1A_P: C66.1 U1.M1
RX2A_N: C67.1 U1.A1
RX2A_P: C68.1 U1.A2
RX_D0_N: P1.H8 U1.K11
RX_D0_P: P1.H7 U1.J12
RX_D1_N: P1.G10 U1.K10
RX_D1_P: P1.G9 U1.J11
RX_D2_N: P1.H11 U1.K9
RX_D2_P: P1.H10 U1.J10
RX_D3_N: P1.D12 U1.K8
RX_D3_P: P1.D11 U1.J9
RX_D4_N: P1.C11 U1.K7
RX_D4_P: P1.C10 U1.J8
RX_D5_N: P1.H14 U1.J7 | length 2987.4
  Top Layer w8: v1(6009.23,2757.28) 6020.01,2746.5 6136.5,2746.5 P1.H14
  Mid-Layer 4 w3.8: v2(4188.22,3158) 4201.21,3145.01 4234.23,3145.01 4238.31,3149.09 4238.31,3163.33 4245.86,3170.88 4260.1,3170.88 4260.21,3170.99 4375.02,3170.99 4453.51,3092.5 4664.23,3092.5 4681.73,3075 4681.73,2860 4666.73,2845 4609.23,2845 4601.73,2837.5 4601.73,2792.5 4614.23,2780 5028.38,2780 5240.88,2567.5 5476.33,2567.5 5501.73,2542.1 5501.73,2484.15 5530.88,2455 5649.23,2455 5659.23,2465 5659.23,2515 5674.23,2530 5716.73,2530 5731.73,2515 5731.73,2475 5751.73,2455 5794.23,2455 5849.23,2510 5849.23,2632.5 5966.01,2749.28 6001.23,2749.28 v1(6009.23,2757.28)
  Bottom Layer w8: U1.J7@4172.48,3173.74 v2(4188.22,3158)
RX_D5_P: P1.H13 U1.H8 | length 2989.1
  Top Layer w8: v1(6009.23,2726.08) 6015.65,2732.5 6147.5,2732.5 P1.H13
  Mid-Layer 4 w3.8: v2(4188.23,3126.5) 4202.23,3112.5 4224.23,3112.5 4236.73,3125 4236.73,3132.5 4248.8,3144.57 4248.8,3144.83 4249.05,3145.08 4277.35,3145.08 4288.06,3145.09 4303.96,3160.99 4370.87,3160.99 4449.36,3082.5 4660.08,3082.5 4671.73,3070.85 4671.73,2864.15 4662.58,2855 4605.08,2855 4591.73,2841.65 4591.73,2788.35 4610.08,2770 5024.23,2770 5236.73,2557.5 5472.18,2557.5 5491.73,2537.95 5491.73,2480 5526.73,2445 5653.38,2445 5669.23,2460.85 5669.23,2510.85 5678.38,2520 5712.58,2520 5721.73,2510.85 5721.73,2470.85 5747.58,2445 5798.38,2445 5859.23,2505.85 5859.23,2628.35 5970.16,2739.28 5996.03,2739.28 v1(6009.23,2726.08)
  Bottom Layer w8: v2(4188.23,3126.5) U1.H8@4203.97,3142.24
RX_EXT_LO: TP102.1 U1.G1
RX_FRAME_N: P1.D9 U1.G7
RX_FRAME_P: P1.D8 U1.G8
RX_VCO_1P1V_SUPPLY: C78.1 R34.1 U1.G2 U1.G3
SCL: P1.C30 R16.1 U5.15 U6.6
SDA: P1.C31 R15.1 U5.14 U6.5
SPI_CLK: R14.2 U1.J5
SPI_DI: P1.C26 U1.J4
SPI_DO: P1.C27 U1.L6
SPI_ENB: P1.D26 R12.1 U1.K6
SYNC_IN: P1.H23 R38.2 U1.H5
TX1A_N: C69.1 L3.2 U1.M8
TX1A_P: C70.1 L4.2 U1.M7
TX2A_N: C73.1 L5.2 U1.A7
TX2A_P: C74.1 L6.2 U1.A8
TX_D0_N: P1.H17 U1.E12
TX_D0_P: P1.H16 U1.D11
TX_D1_N: P1.G16 U1.E11
TX_D1_P: P1.G15 U1.D10
TX_D2_N: P1.D18 U1.E10
TX_D2_P: P1.D17 U1.D9
TX_D3_N: P1.C15 U1.E9
TX_D3_P: P1.C14 U1.D8
TX_D4_N: P1.C19 U1.E8
TX_D4_P: P1.C18 U1.D7
TX_D5_N: P1.H20 U1.F8
TX_D5_P: P1.H19 U1.E7
TX_EXT_LO: TP101.1 U1.A12
TX_FRAME_N: P1.D15 U1.H9
TX_FRAME_P: P1.D14 U1.G9
TX_MON1: C80.2 U1.M5
TX_MON2: C82.2 U1.A5
TX_VCO_1P1V_SUPPLY: C81.1 R35.1 U1.A11 U1.B11
TXNRX: P1.G19 P2.2 U1.H4
VADJ: C48.1 C49.1 E3.2 P1.G39 P1.H40
VDD_INTERFACE: C50.1 C51.1 C52.1 C53.1 C54.1 C55.1 E2.1 E3.1 R3.1 R10.1 R12.2 R18.1 TP243.1 U1.H12
VDDA_GPO: C7.1 C8.1 C9.1 C10.1 C11.1 E1.1 R22.1 TP240.1 U1.B8
pads on no net: DS1.A DS1.C P1. P1.C2 P1.C3 P1.C6 P1.C7 P1.C22 P1.C23 P1.D4 P1.D5 P1.D20 P1.D21 P1.D29 P1.D33 P1.D34 P1.G2 P1.G3 P1.G30 P1.G31 P1.G33 P1.G34 P1.G36 P1.G37 P1.H1 P1.H5 P1.H32 P1.H34 P1.H35 P1.H37 P1.H38 U1.A3 U1.M3 U2.8 U4.8 U5.12

## Text inside footprints (layer, text, board x,y; h text height)
C1: Mechanical 34 "2" at 32281.25,1420 h25; Mechanical 34 "1" at 32238.75,1420 h25; Mechanical 39 "C0402" at 32255,1425 h50; Mechanical 39 "27.5x25x15" at 32260,1176 h31; Top Assembly "1uF" at 32264.33,1385.83 h25; Top Assembly "10" at 32264.72,1356.06 h25; Top Assembly "UPN" at 32260.79,1331.5 h25
C2: Mechanical 34 "2" at 27386.25,1420 h25; Mechanical 34 "1" at 27343.75,1420 h25; Mechanical 39 "C0402" at 27360,1425 h50; Mechanical 39 "27.5x25x15" at 27365,1176 h31; Top Assembly "1uF" at 27369.33,1385.83 h25; Top Assembly "10" at 27369.72,1356.06 h25; Top Assembly "UPN" at 27365.79,1331.5 h25
C3: Mechanical 34 "2" at 27816.25,1420 h25; Mechanical 34 "1" at 27773.75,1420 h25; Mechanical 39 "C0402" at 27790,1425 h50; Mechanical 39 "27.5x25x15" at 27795,1176 h31; Top Assembly "1uF" at 27799.33,1385.83 h25; Top Assembly "10" at 27799.72,1356.06 h25; Top Assembly "UPN" at 27795.79,1331.5 h25
C4: Mechanical 34 "2" at 28246.25,1420 h25; Mechanical 34 "1" at 28203.75,1420 h25; Mechanical 39 "C0402" at 28220,1425 h50; Mechanical 39 "27.5x25x15" at 28225,1176 h31; Top Assembly "1uF" at 28229.33,1385.83 h25; Top Assembly "10" at 28229.72,1356.06 h25; Top Assembly "UPN" at 28225.79,1331.5 h25
C5: Mechanical 34 "2" at 28676.25,1420 h25; Mechanical 34 "1" at 28633.75,1420 h25; Mechanical 39 "C0402" at 28650,1425 h50; Mechanical 39 "27.5x25x15" at 28655,1176 h31; Top Assembly "1uF" at 28659.33,1385.83 h25; Top Assembly "10" at 28659.72,1356.06 h25; Top Assembly "UPN" at 28655.79,1331.5 h25
C6: Mechanical 34 "2" at 29106.25,1420 h25; Mechanical 34 "1" at 29063.75,1420 h25; Mechanical 39 "C0402" at 29080,1425 h50; Mechanical 39 "27.5x25x15" at 29085,1176 h31; Top Assembly "1uF" at 29089.33,1385.83 h25; Top Assembly "10" at 29089.72,1356.06 h25; Top Assembly "UPN" at 29085.79,1331.5 h25
C7: Mechanical 34 "2" at 29536.25,1420 h25; Mechanical 34 "1" at 29493.75,1420 h25; Mechanical 39 "C0402" at 29510,1425 h50; Mechanical 39 "27.5x25x15" at 29515,1176 h31; Top Assembly "1uF" at 29519.33,1385.83 h25; Top Assembly "10" at 29519.72,1356.06 h25; Top Assembly "UPN" at 29515.79,1331.5 h25
C8: Mechanical 34 "2" at 29966.25,1420 h25; Mechanical 34 "1" at 29923.75,1420 h25; Mechanical 39 "C0402" at 29940,1425 h50; Mechanical 39 "27.5x25x15" at 29945,1176 h31; Top Assembly "1uF" at 29949.33,1385.83 h25; Top Assembly "10" at 29949.72,1356.06 h25; Top Assembly "UPN" at 29945.79,1331.5 h25
C9: Mechanical 34 "2" at 30396.25,1420 h25; Mechanical 34 "1" at 30353.75,1420 h25; Mechanical 39 "C0402" at 30370,1425 h50; Mechanical 39 "27.5x25x15" at 30375,1176 h31; Top Assembly "1uF" at 30379.33,1385.83 h25; Top Assembly "10" at 30379.72,1356.06 h25; Top Assembly "UPN" at 30375.79,1331.5 h25
C10: Mechanical 34 "2" at 30846.25,1420 h25; Mechanical 34 "1" at 30803.75,1420 h25; Mechanical 39 "C0402" at 30820,1425 h50; Mechanical 39 "27.5x25x15" at 30825,1176 h31; Top Assembly "1uF" at 30829.33,1385.83 h25; Top Assembly "10" at 30829.72,1356.06 h25; Top Assembly "UPN" at 30825.79,1331.5 h25
C11: Mechanical 34 "2" at 31286.25,1420 h25; Mechanical 34 "1" at 31243.75,1420 h25; Mechanical 39 "C0402" at 31260,1425 h50; Mechanical 39 "27.5x25x15" at 31265,1176 h31; Top Assembly "1uF" at 31269.33,1385.83 h25; Top Assembly "10" at 31269.72,1356.06 h25; Top Assembly "UPN" at 31265.79,1331.5 h25
C12: Mechanical 34 "2" at 23636.25,1420 h25; Mechanical 34 "1" at 23593.75,1420 h25; Mechanical 39 "C0402" at 23610,1425 h50; Mechanical 39 "27.5x25x15" at 23615,1176 h31; Top Assembly "1uF" at 23619.33,1385.83 h25; Top Assembly "10" at 23619.72,1356.06 h25; Top Assembly "UPN" at 23615.79,1331.5 h25
C13: Mechanical 34 "2" at 24086.25,1420 h25; Mechanical 34 "1" at 24043.75,1420 h25; Mechanical 39 "C0402" at 24060,1425 h50; Mechanical 39 "27.5x25x15" at 24065,1176 h31; Top Assembly "1uF" at 24069.33,1385.83 h25; Top Assembly "10" at 24069.72,1356.06 h25; Top Assembly "UPN" at 24065.79,1331.5 h25
C14: Mechanical 34 "2" at 24541.25,1420 h25; Mechanical 34 "1" at 24498.75,1420 h25; Mechanical 39 "C0402" at 24515,1425 h50; Mechanical 39 "27.5x25x15" at 24520,1176 h31; Top Assembly "1uF" at 24524.33,1385.83 h25; Top Assembly "10" at 24524.72,1356.06 h25; Top Assembly "UPN" at 24520.79,1331.5 h25
C15: Mechanical 34 "2" at 24996.25,1420 h25; Mechanical 34 "1" at 24953.75,1420 h25; Mechanical 39 "C0402" at 24970,1425 h50; Mechanical 39 "27.5x25x15" at 24975,1176 h31; Top Assembly "1uF" at 24979.33,1385.83 h25; Top Assembly "10" at 24979.72,1356.06 h25; Top Assembly "UPN" at 24975.79,1331.5 h25
C16: Mechanical 34 "2" at 25446.25,1420 h25; Mechanical 34 "1" at 25403.75,1420 h25; Mechanical 39 "C0402" at 25420,1425 h50; Mechanical 39 "27.5x25x15" at 25425,1176 h31; Top Assembly "1uF" at 25429.33,1385.83 h25; Top Assembly "10" at 25429.72,1356.06 h25; Top Assembly "UPN" at 25425.79,1331.5 h25
C17: Mechanical 34 "2" at 25901.25,1420 h25; Mechanical 34 "1" at 25858.75,1420 h25; Mechanical 39 "C0402" at 25875,1425 h50; Mechanical 39 "27.5x25x15" at 25880,1176 h31; Top Assembly "1uF" at 25884.33,1385.83 h25; Top Assembly "10" at 25884.72,1356.06 h25; Top Assembly "UPN" at 25880.79,1331.5 h25
C18: Mechanical 34 "2" at 26351.25,1420 h25; Mechanical 34 "1" at 26308.75,1420 h25; Mechanical 39 "C0402" at 26325,1425 h50; Mechanical 39 "27.5x25x15" at 26330,1176 h31; Top Assembly "1uF" at 26334.33,1385.83 h25; Top Assembly "10" at 26334.72,1356.06 h25; Top Assembly "UPN" at 26330.79,1331.5 h25
C19: Mechanical 34 "2" at 26806.25,1420 h25; Mechanical 34 "1" at 26763.75,1420 h25; Mechanical 39 "C0402" at 26780,1425 h50; Mechanical 39 "27.5x25x15" at 26785,1176 h31; Top Assembly "1uF" at 26789.33,1385.83 h25; Top Assembly "10" at 26789.72,1356.06 h25; Top Assembly "UPN" at 26785.79,1331.5 h25
C20: Mechanical 34 "2" at 22985,1261.25 h25 r90; Mechanical 34 "1" at 22985,1218.75 h25 r90; Mechanical 39 "C0402" at 22980,1235 h50 r90; Mechanical 39 "27.5x25x15" at 23229,1240 h31 r90; Top Assembly "1uF" at 23019.17,1244.33 h25 r90; Top Assembly "10" at 23048.94,1244.72 h25 r90; Top Assembly "UPN" at 23073.5,1240.79 h25 r90
C21: Mechanical 34 "2" at 21961.25,1420 h25; Mechanical 34 "1" at 21918.75,1420 h25; Mechanical 39 "C0402" at 21935,1425 h50; Mechanical 39 "27.5x25x15" at 21940,1176 h31; Top Assembly "1uF" at 21944.33,1385.83 h25; Top Assembly "10" at 21944.72,1356.06 h25; Top Assembly "UPN" at 21940.79,1331.5 h25
C22: Mechanical 34 "2" at 22290,1261.25 h25 r90; Mechanical 34 "1" at 22290,1218.75 h25 r90; Mechanical 39 "C0402" at 22285,1235 h50 r90; Mechanical 39 "27.5x25x15" at 22534,1240 h31 r90; Top Assembly "1uF" at 22324.17,1244.33 h25 r90; Top Assembly "10" at 22353.94,1244.72 h25 r90; Top Assembly "UPN" at 22378.5,1240.79 h25 r90
C23: Mechanical 34 "2" at 21135,1261.25 h25 r90; Mechanical 34 "1" at 21135,1218.75 h25 r90; Mechanical 39 "C0402" at 21130,1235 h50 r90; Mechanical 39 "27.5x25x15" at 21379,1240 h31 r90; Top Assembly "1uF" at 21169.17,1244.33 h25 r90; Top Assembly "10" at 21198.94,1244.72 h25 r90; Top Assembly "UPN" at 21223.5,1240.79 h25 r90
C24: Mechanical 34 "2" at 21490,1261.25 h25 r90; Mechanical 34 "1" at 21490,1218.75 h25 r90; Mechanical 39 "C0402" at 21485,1235 h50 r90; Mechanical 39 "27.5x25x15" at 21734,1240 h31 r90; Top Assembly "1uF" at 21524.17,1244.33 h25 r90; Top Assembly "10" at 21553.94,1244.72 h25 r90; Top Assembly "UPN" at 21578.5,1240.79 h25 r90
C25: Mechanical 34 "2" at 20385,1261.25 h25 r90; Mechanical 34 "1" at 20385,1218.75 h25 r90; Mechanical 39 "C0402" at 20380,1235 h50 r90; Mechanical 39 "27.5x25x15" at 20629,1240 h31 r90; Top Assembly "1uF" at 20419.17,1244.33 h25 r90; Top Assembly "10" at 20448.94,1244.72 h25 r90; Top Assembly "UPN" at 20473.5,1240.79 h25 r90
C26: Mechanical 34 "2" at 19675,1261.25 h25 r90; Mechanical 34 "1" at 19675,1218.75 h25 r90; Mechanical 39 "C0402" at 19670,1235 h50 r90; Mechanical 39 "27.5x25x15" at 19919,1240 h31 r90; Top Assembly "1uF" at 19709.17,1244.33 h25 r90; Top Assembly "10" at 19738.94,1244.72 h25 r90; Top Assembly "UPN" at 19763.5,1240.79 h25 r90
C27: Mechanical 34 "2" at 20030,1261.25 h25 r90; Mechanical 34 "1" at 20030,1218.75 h25 r90; Mechanical 39 "C0402" at 20025,1235 h50 r90; Mechanical 39 "27.5x25x15" at 20274,1240 h31 r90; Top Assembly "1uF" at 20064.17,1244.33 h25 r90; Top Assembly "10" at 20093.94,1244.72 h25 r90; Top Assembly "UPN" at 20118.5,1240.79 h25 r90
C28: Mechanical 34 "2" at 18980,1261.25 h25 r90; Mechanical 34 "1" at 18980,1218.75 h25 r90; Mechanical 39 "C0402" at 18975,1235 h50 r90; Mechanical 39 "27.5x25x15" at 19224,1240 h31 r90; Top Assembly "1uF" at 19014.17,1244.33 h25 r90; Top Assembly "10" at 19043.94,1244.72 h25 r90; Top Assembly "UPN" at 19068.5,1240.79 h25 r90
C29: Mechanical 34 "2" at 18625,1261.25 h25 r90; Mechanical 34 "1" at 18625,1218.75 h25 r90; Mechanical 39 "C0402" at 18620,1235 h50 r90; Mechanical 39 "27.5x25x15" at 18869,1240 h31 r90; Top Assembly "1uF" at 18659.17,1244.33 h25 r90; Top Assembly "10" at 18688.94,1244.72 h25 r90; Top Assembly "UPN" at 18713.5,1240.79 h25 r90
C30: Mechanical 34 "2" at 17860,1261.25 h25 r90; Mechanical 34 "1" at 17860,1218.75 h25 r90; Mechanical 39 "C0402" at 17855,1235 h50 r90; Mechanical 39 "27.5x25x15" at 18104,1240 h31 r90; Top Assembly "1uF" at 17894.17,1244.33 h25 r90; Top Assembly "10" at 17923.94,1244.72 h25 r90; Top Assembly "UPN" at 17948.5,1240.79 h25 r90
C31: Mechanical 34 "2" at 14876.25,1420 h25; Mechanical 34 "1" at 14833.75,1420 h25; Mechanical 39 "C0402" at 14850,1425 h50; Mechanical 39 "27.5x25x15" at 14855,1176 h31; Top Assembly "1uF" at 14859.33,1385.83 h25; Top Assembly "10" at 14859.72,1356.06 h25; Top Assembly "UPN" at 14855.79,1331.5 h25
C32: Mechanical 34 "2" at 15205,1261.25 h25 r90; Mechanical 34 "1" at 15205,1218.75 h25 r90; Mechanical 39 "C0402" at 15200,1235 h50 r90; Mechanical 39 "27.5x25x15" at 15449,1240 h31 r90; Top Assembly "1uF" at 15239.17,1244.33 h25 r90; Top Assembly "10" at 15268.94,1244.72 h25 r90; Top Assembly "UPN" at 15293.5,1240.79 h25 r90
C33: Mechanical 34 "2" at 15560,1261.25 h25 r90; Mechanical 34 "1" at 15560,1218.75 h25 r90; Mechanical 39 "C0402" at 15555,1235 h50 r90; Mechanical 39 "27.5x25x15" at 15804,1240 h31 r90; Top Assembly "1uF" at 15594.17,1244.33 h25 r90; Top Assembly "10" at 15623.94,1244.72 h25 r90; Top Assembly "UPN" at 15648.5,1240.79 h25 r90
C34: Mechanical 34 "2" at 15915,1261.25 h25 r90; Mechanical 34 "1" at 15915,1218.75 h25 r90; Mechanical 39 "C0402" at 15910,1235 h50 r90; Mechanical 39 "27.5x25x15" at 16159,1240 h31 r90; Top Assembly "1uF" at 15949.17,1244.33 h25 r90; Top Assembly "10" at 15978.94,1244.72 h25 r90; Top Assembly "UPN" at 16003.5,1240.79 h25 r90
C35: Mechanical 34 "2" at 16270,1261.25 h25 r90; Mechanical 34 "1" at 16270,1218.75 h25 r90; Mechanical 39 "C0402" at 16265,1235 h50 r90; Mechanical 39 "27.5x25x15" at 16514,1240 h31 r90; Top Assembly "1uF" at 16304.17,1244.33 h25 r90; Top Assembly "10" at 16333.94,1244.72 h25 r90; Top Assembly "UPN" at 16358.5,1240.79 h25 r90